# Altium PCB PCB.PcbDoc
Units mil, origin at the board's own origin, x right, y up, seen from the top; angles counter-clockwise.
Board outline 3930 x 3395 mil, 2 copper layers (Top Layer, Bottom Layer); 22 components, 59 nets, 336 pads, 114 vias.
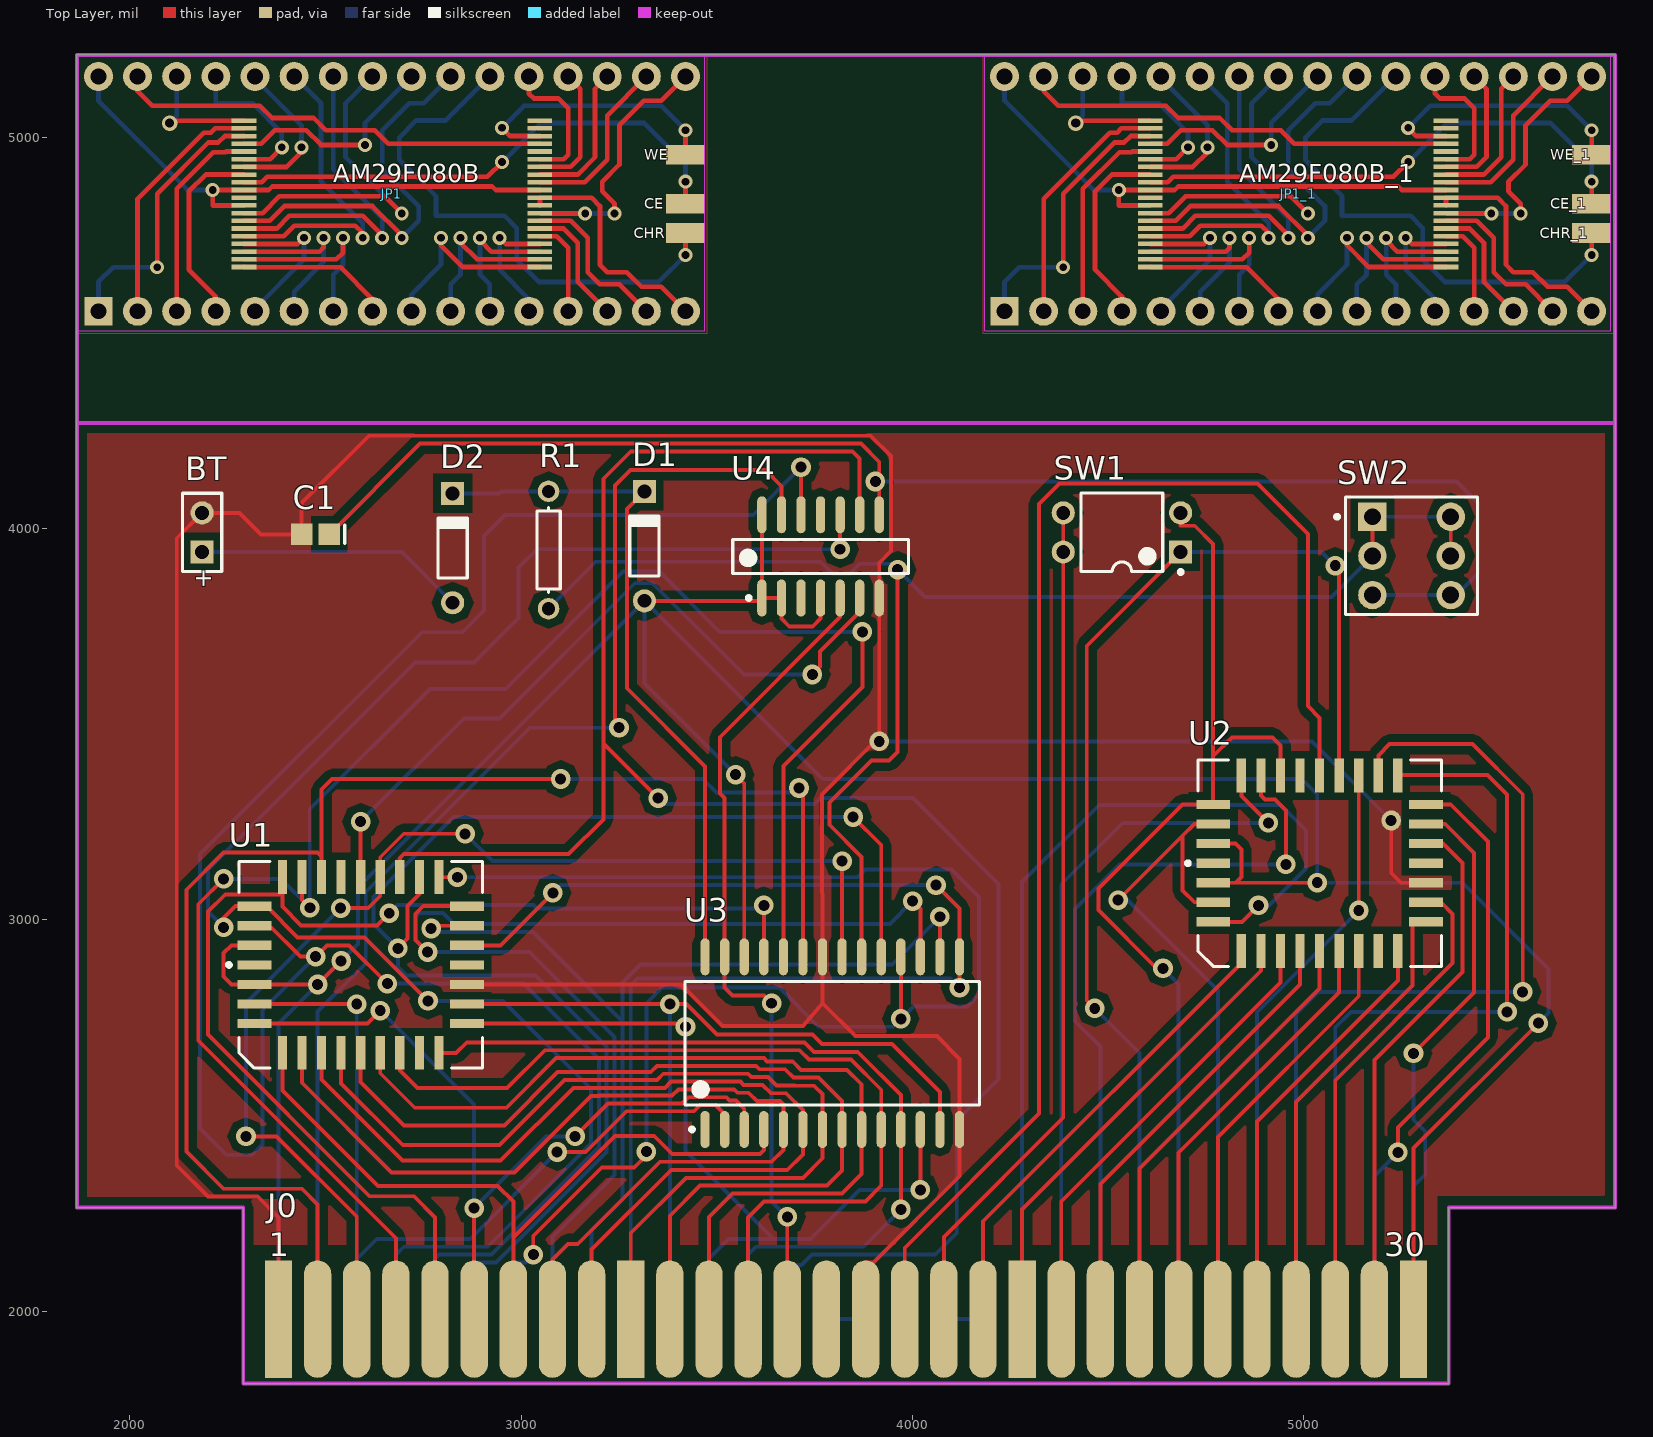
[diagram p0: Top Layer view]
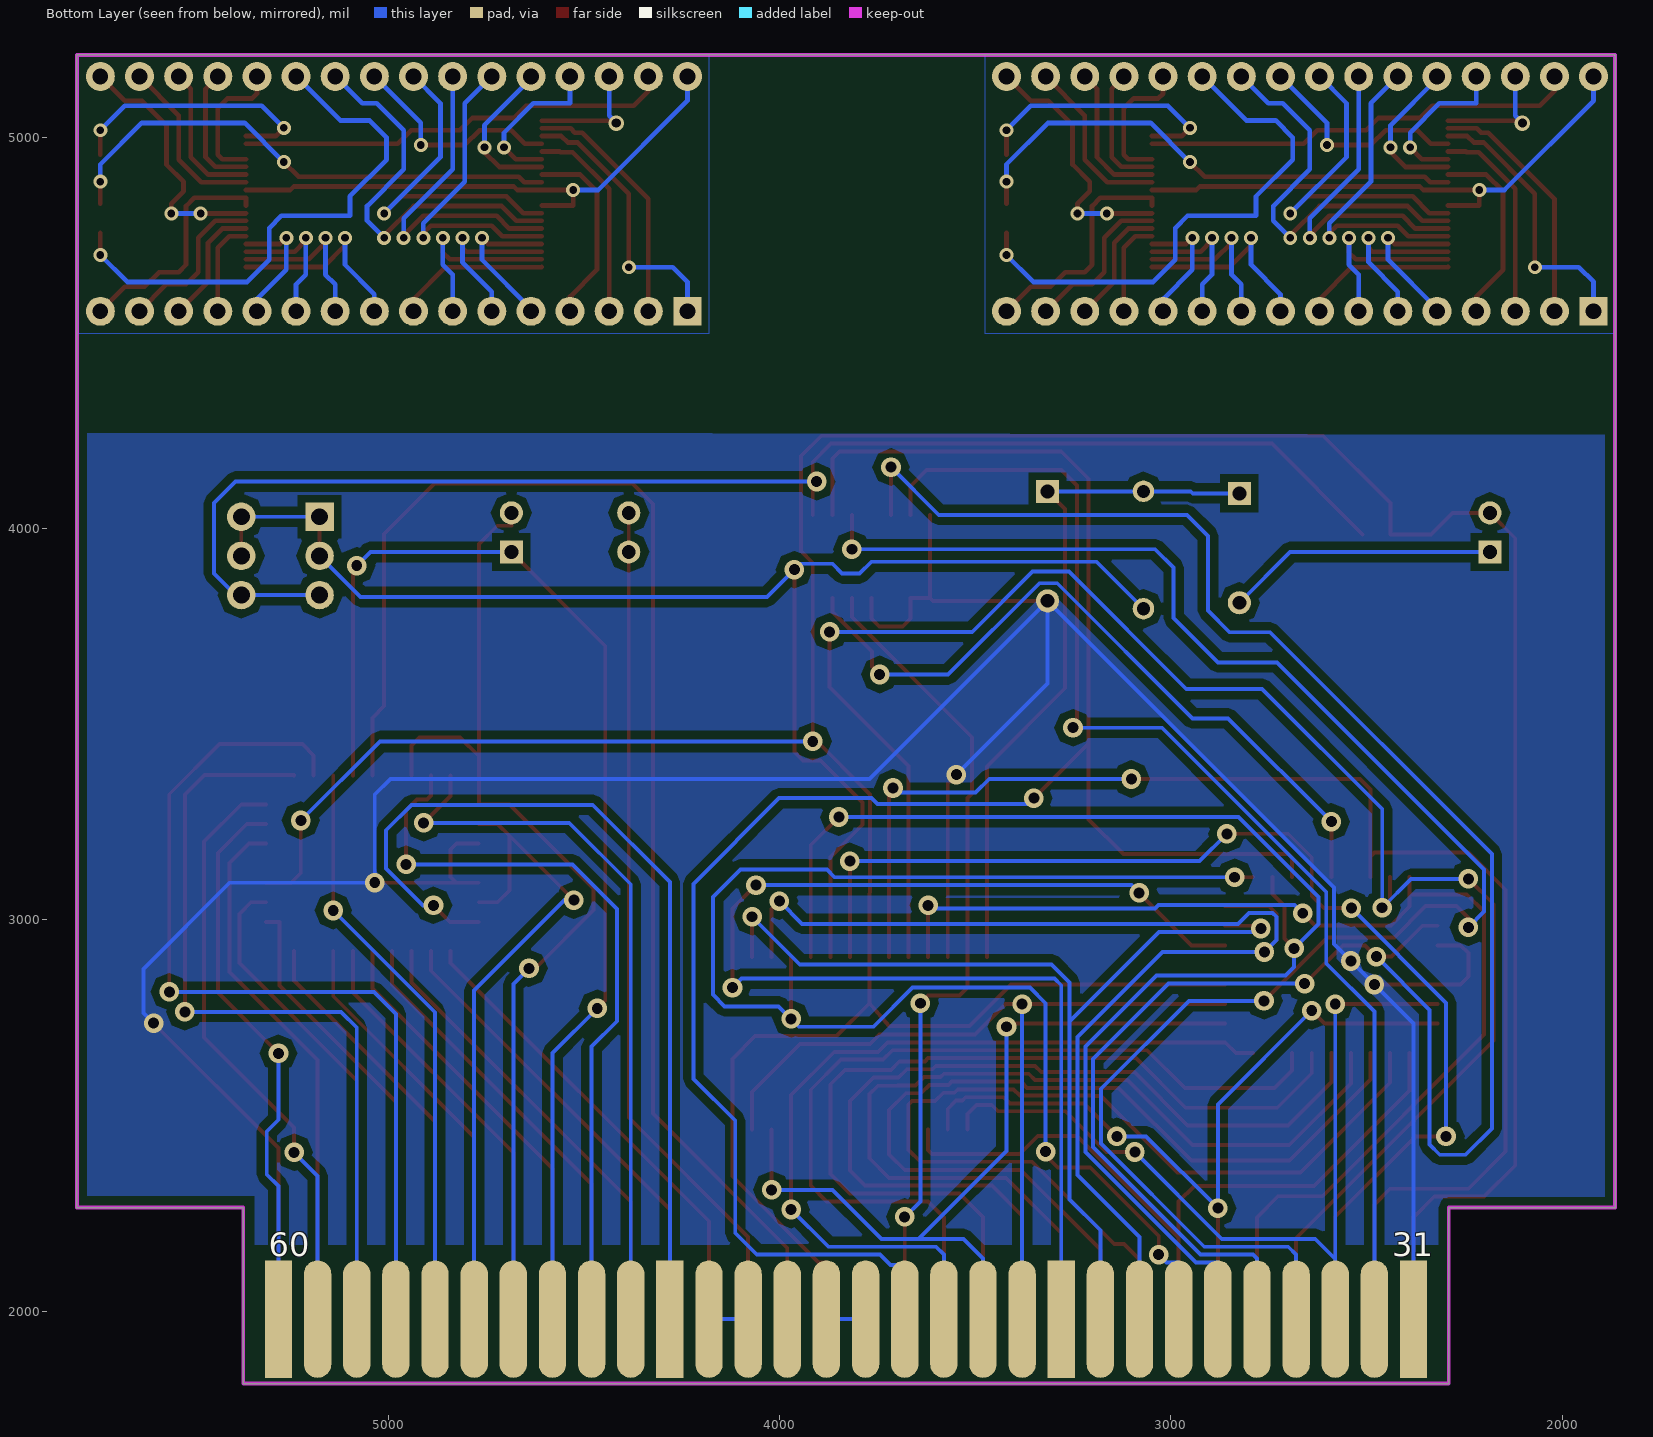
[diagram p1: Bottom Layer view, seen from below]

## Layer stack, top to bottom
Top Solder: solder mask 0.4, Solder Resist, Dk 3.5
Top Layer: signal copper 1.4
Dielectric 1: dielectric 12.6, FR-4, Dk 4.8
Bottom Layer: signal copper 1.4
Bottom Solder: solder mask 0.4, Solder Resist, Dk 3.5

## Board outline
2290,1815 2290,2265 1865,2265 1865,5210 5795,5210 5795,2265 5370,2265 5370,1815

## Design rules (kind name [scope] priority, off if disabled: settings)
Clearance Clearance_5 [InNamedPolygon('GND_L01_P000')] p1: gap=20 ignorepadtopadclearanceinfootprint=FALSE
Clearance Clearance_4 [InNamedPolygon('+5_L02_P002')] p2: gap=20 ignorepadtopadclearanceinfootprint=FALSE
Clearance Clearance_3 [InNamedPolygon('GND_L01_P000')] p3: gap=10 ignorepadtopadclearanceinfootprint=FALSE
Clearance Clearance_2 [InNamedPolygon('+5_L02_P002')] p4: gap=10 ignorepadtopadclearanceinfootprint=FALSE
Clearance Clearance_1 [InNamedPolygon('+5_L02_P002')] p5: gap=10 ignorepadtopadclearanceinfootprint=FALSE except(0: Arc-Hole Track-Hole SMDPad-Hole THPad-Hole Via-Hole Fill-Hole Poly-Hole Region-Hole Text-Hole)
Clearance [All] p6: gap=10 ignorepadtopadclearanceinfootprint=FALSE
PolygonConnect PolygonConnect_3 [All vs IsNamedPolygon('+5_L02_P002')] p1: connectstyle=Direct reliefconductorwidth=10 reliefentries=4 polygonreliefangle="90 Angle" airgapwidth=10
PolygonConnect PolygonConnect_2 [All vs IsNamedPolygon('GND_L01_P000')] p2: connectstyle=Direct reliefconductorwidth=10 reliefentries=4 polygonreliefangle="90 Angle" airgapwidth=10
PolygonConnect PolygonConnect_1 [All vs IsNamedPolygon('+5_L02_P002')] p3: connectstyle=Relief reliefconductorwidth=10 reliefentries=4 polygonreliefangle="90 Angle" airgapwidth=10
PolygonConnect [All] p4: connectstyle=Relief reliefconductorwidth=10 reliefentries=4 polygonreliefangle="90 Angle" airgapwidth=10
RoutingVias [All] p1: holewidth=28 width=50 viastyle="Through Hole" minholewidth=28 minwidth=50 maxholewidth=28 maxwidth=50
SolderMaskExpansion [All] p1: expansion=4
UnRoutedNet [All] p1: checkbadconnections=TRUE
Width [All] p1: maxlimit=10 minlimit=10 preferedwidth=10
29 further rules are at their usual default settings.

## Classes and differential pairs
component class Schematics: BT C1 D1 D2 J0 R1 SW1 SW2 U1 U2 U3 U4

## Components (designator, comment, footprint, x,y, rotation, side; value= is the part's Value field where it differs from the comment)
AM29F080B "TSOP40" TSOP40 2670,4855 r270 top
AM29F080B_1 "TSOP40" TSOP40 4985,4855 r270 top (schematic designator AM29F080B)
BT "3V Battery" BAT-2 2185,3990 r90 top
C1 "Cap Semi" C2512 2474.57,3985 r180 top value=68pF
CE "" SMD1,27-2,54 3420,4830 r90 top
CE_1 "" SMD1,27-2,54 5735,4830 r90 top (schematic designator CE)
CHR "" SMD1,27-2,54 3420,4755 r90 top
CHR_1 "" SMD1,27-2,54 5735,4755 r90 top (schematic designator CHR)
D1 "1n4148" DO-35 3315,3955 r90 top
D2 "1n4148" DO-35 2825,3950 r90 top
J0 "Famicom Edge Connector" CartridgeBondingFinger 2380,1980 r0 top
JP1 "MMC5" DIP32 1920,4555 r0 top
JP1_1 "MMC5" DIP32 4235,4555 r0 top (schematic designator JP1)
R1 "Res1" AXIAL-0.3 3070,3945 r270 top value=10K
SW1 "Mirroring Control" DIP-4 4535,3990 r180 top
SW2 "Switch" DPDT-6 5275,3930 r0 top
U1 "PRG ROM" PLCC32 2590,2885 r90 top
U2 "CHR ROM" PLCC32 5040,3145 r90 top
U3 "PRG RAM" SOP127P1207-28N 3795,2685 r90 top
U4 "PRG RAM /CS & PRG ROM /OE Generator" SOP127P636-14N 3765,3928.7 r90 top
WE "" SMD1,27-2,54 3420,4955 r90 top
WE_1 "" SMD1,27-2,54 5735,4955 r90 top (schematic designator WE)

## Footprints (in the part's own frame and the unit in brackets; to place one, negate y for a bottom-side part, rotate by r counter-clockwise, add the part's x,y. Pads: shape width x height; smd on the part's side, far side on the other; paste and mask are expansions set on the pad)
AXIAL-0.3 [mm] "Axial Device, Thru-Hole; 2 Leads; 0.3 in Pin Spacing"
  round 1.4 hole 0.85: 1(-3.81,0) 2(3.81,0)
  silkscreen extent -2.77,-0.76 2.77,0.76
BAT-2 [mm] "Battery; 2 Leads"
  rect 1.5x1.5 hole 0.9: 1(-1.27,0)
  round 1.5 hole 0.9: 2(1.27,0)
  silkscreen extent -2.54,-1.27 2.54,1.27
C2512 [mm] "Chip Capacitor, Body 2.54x1.27mm, IPC High Density"
  rect 1.4x1.4 smd: 1(-0.9,0) 2(0.9,0)
  silkscreen extent -1.9,-0.6 -1.9,0.6, body extent -1.45,-0.82 1.45,0.82, height 1.3
CartridgeBondingFinger [mil]
  rect 70x300 smd: 1(0,0) 10(900,0) 20(1900,0) 30(2900,0)
  oval 70x300 smd: 2(100,0) 3(200,0) 4(300,0) 5(400,0) 6(500,0) 7(600,0) 8(700,0) 9(800,0) 11(1000,0) 12(1100,0) 13(1200,0) 14(1300,0) 15(1400,0) 16(1500,0) 17(1600,0) 18(1700,0) 19(1800,0) 21(2000,0) 22(2100,0) 23(2200,0) 24(2300,0) 25(2400,0) 26(2500,0) 27(2600,0) 28(2700,0) 29(2800,0)
  rect 70x300 smd far side: 31(0,0) 40(900,0) 50(1900,0) 60(2900,0)
  oval 70x300 smd far side: 32(100,0) 33(200,0) 34(300,0) 35(400,0) 36(500,0) 37(600,0) 38(700,0) 39(800,0) 41(1000,0) 42(1100,0) 43(1200,0) 44(1300,0) 45(1400,0) 46(1500,0) 47(1600,0) 48(1700,0) 49(1800,0) 51(2000,0) 52(2100,0) 53(2200,0) 54(2300,0) 55(2400,0) 56(2500,0) 57(2600,0) 58(2700,0) 59(2800,0)
DIP32 [mil] "DIP32"
  rect 71.65x71.65 / inner rect 60x60 / far side rect 71.65x71.65 hole 40: 1(0,0)
  round 74 / inner round 60 / far side round 74 hole 40: 2(100,0) 3(200,0) 4(300,0) 5(400,0) 6(500,0) 7(600,0) 8(700,0) 9(800,0) 10(900,0) 11(1000,0) 12(1100,0) 13(1200,0) 14(1300,0) 15(1400,0) 16(1500,0) 17(1500,600) 18(1400,600) 19(1300,600) 20(1200,600) 21(1100,600) 22(1000,600) 23(900,600) 24(800,600) 25(700,600) 26(600,600) 27(500,600) 28(400,600) 29(300,600) 30(200,600) 31(100,600) 32(0,600)
DIP-4 [mm] "DIP; 4 Leads; Row Spacing 7.62 mm; Pitch 2.54 mm"
  rect 1.5x1.5 hole 0.9: 1(-3.81,1.27)
  round 1.5 hole 0.9: 2(-3.81,-1.27) 3(3.81,-1.27) 4(3.81,1.27)
  silkscreen extent -3.94,-2.55 2.65,2.69, body extent -3.15,-2.5 3.15,2.5, height 5.6
DO-35 [mm] "Diode, Axial; Body 3.8 x 1.9 mm (LxDia. max), Lead Dia. 0.53 mm (max)"
  round 1.5 hole 0.9: 1(-3.55,0)
  rect 1.5x1.5 hole 0.9: 2(3.55,0)
  silkscreen extent -1.95,-0.95 2.05,0.95
DPDT-6 [mm]
  rect 1.85x1.85 hole 1.1: 1(-2.54,2.54)
  round 1.85 hole 1.1: 2(-2.54,0) 3(-2.54,-2.54) 4(2.54,-2.54) 5(2.54,0) 6(2.54,2.54)
  silkscreen extent -4.96,-3.81 4.28,3.81
PLCC32 [mm] "Leaded Chip Carrier; 32 Leads; Body 11.5 x 14 mm"
  rect 0.6x2.2 smd: 1(0,6.9) 2(-1.27,6.9) 3(-2.54,6.9) 4(-3.81,6.9) 14(-3.81,-6.9) 15(-2.54,-6.9) 16(-1.27,-6.9) 17(0,-6.9) 18(1.27,-6.9) 19(2.54,-6.9) 20(3.81,-6.9) 30(3.81,6.9) 31(2.54,6.9) 32(1.27,6.9)
  rect 2.2x0.6 smd: 5(-5.7,5.08) 6(-5.7,3.81) 7(-5.7,2.54) 8(-5.7,1.27) 9(-5.7,0) 10(-5.7,-1.27) 11(-5.7,-2.54) 12(-5.7,-3.81) 13(-5.7,-5.08) 21(5.7,-5.08) 22(5.7,-3.81) 23(5.7,-2.54) 24(5.7,-1.27) 25(5.7,0) 26(5.7,1.27) 27(5.7,2.54) 28(5.7,3.81) 29(5.7,5.08)
  silkscreen extent -6.7,-7.9 6.7,8.67
SMD1,27-2,54 [mil] "SMD1,27-2,54"
  rect 50x100 smd: 1(0,0)
SOP127P636-14N [mm] "SOP, 14-Leads, Body 11x4.7mm, Pitch 1.27mm, IPC Medium Density"
  oval 2.4x0.6 smd: 1(-2.7,3.81) 2(-2.7,2.54) 3(-2.7,1.27) 4(-2.7,0) 5(-2.7,-1.27) 6(-2.7,-2.54) 7(-2.7,-3.81) 8(2.7,-3.81) 9(2.7,-2.54) 10(2.7,-1.27) 11(2.7,0) 12(2.7,1.27) 13(2.7,2.54) 14(2.7,3.81)
  silkscreen extent -2.82,-5.7 1.1,5.7, body extent -2.36,-5.72 2.36,5.71, height 1.5
SOP127P1207-28N [mm] "SOP, 28-Leads, Body 18.1x8.6mm, Pitch 1.27mm, IPC Medium Density"
  oval 2.4x0.6 smd: 1(-5.6,8.255) 2(-5.6,6.985) 3(-5.6,5.715) 4(-5.6,4.445) 5(-5.6,3.175) 6(-5.6,1.905) 7(-5.6,0.635) 8(-5.6,-0.635) 9(-5.6,-1.905) 10(-5.6,-3.175) 11(-5.6,-4.445) 12(-5.6,-5.715) 13(-5.6,-6.985) 14(-5.6,-8.255) 15(5.6,-8.255) 16(5.6,-6.985) 17(5.6,-5.715) 18(5.6,-4.445) 19(5.6,-3.175) 20(5.6,-1.905) 21(5.6,-0.635) 22(5.6,0.635) 23(5.6,1.905) 24(5.6,3.175) 25(5.6,4.445) 26(5.6,5.715) 27(5.6,6.985) 28(5.6,8.255)
  silkscreen extent -5.72,-9.55 4,9.55, body extent -5.01,-9.52 5.01,9.53, height 3.05
TSOP40 [mil] "TSOP40"
  rect 11.81x62.99 smd: 1(-187.01,-377.95) 2(-167.32,-377.95) 3(-147.64,-377.95) 4(-127.95,-377.95) 5(-108.27,-377.95) 6(-88.58,-377.95) 7(-68.9,-377.95) 8(-49.21,-377.95) 9(-29.53,-377.95) 10(-9.84,-377.95) 11(9.84,-377.95) 12(29.53,-377.95) 13(49.21,-377.95) 14(68.9,-377.95) 15(88.58,-377.95) 16(108.27,-377.95) 17(127.95,-377.95) 18(147.64,-377.95) 19(167.32,-377.95) 20(187.01,-377.95) 21(187.01,377.95) 22(167.32,377.95) 23(147.64,377.95) 24(127.95,377.95) 25(108.27,377.95) 26(88.58,377.95) 27(68.9,377.95) 28(49.21,377.95) 29(29.53,377.95) 30(9.84,377.95) 31(-9.84,377.95) 32(-29.53,377.95) 33(-49.21,377.95) 34(-68.9,377.95) 35(-88.58,377.95) 36(-108.27,377.95) 37(-127.95,377.95) 38(-147.64,377.95) 39(-167.32,377.95) 40(-187.01,377.95)

## Part data
BT: library part Battery, "Multicell Battery", LatestRevisionDate=17-Jul-2002, LatestRevisionNote="Re-released for DXP Platform.", PackageDescription="Battery; 2 Leads", PackageReference=BAT-2, Published=24-Mar-1999, Publisher="Altium Limited"
C1: "Capacitor (Semiconductor SIM Model)", LatestRevisionDate=29-May-2009, LatestRevisionNote="IPC-7351 Footprint Added.", PackageDescription="Chip Capacitor", PackageReference=C1206, Published=8-Jun-2000, Publisher="Altium Limited"
CE CE_1 CHR CHR_1 WE WE_1: library part SMD1,27-2,54, PackageName=SMD1,27-2,54
D1 D2: library part "Diode 1N4148", "High Conductance Fast Diode", Code_JEDEC=DO-204-AH, ComponentLink1Description="Manufacturer Link", ComponentLink1URL=http://www.fairchildsemi.com/, ComponentLink2Description=Datasheet, ComponentLink2URL=http://www.fairchildsemi.com/ds/1N%2F1N4148.pdf, DatasheetVersion=1997, LatestRevisionDate=17-Jul-2002, LatestRevisionNote="Re-released for DXP Platform.", PackageDescription="Diode, Axial; Body 3.8 x 1.9 mm (LxDia. max), Lead Dia. 0.53 mm (max)", PackageReference=DO-35, Published=8-Jun-2000, Publisher="Altium Limited"
J0: library part CartridgeBondingFinger
JP1 JP1_1: library part DIP32, PackageName=DIP32
R1: "Resistor", LatestRevisionDate=17-Jul-2002, LatestRevisionNote="Re-released for DXP Platform.", PackageDescription="Axial Device, Thru-Hole; 2 Leads; 0.3 in Pin Spacing", PackageReference=AXIAL-0.3, Published=8-Jun-2000, Publisher="Altium Limited"
SW1: library part "SW DIP-2", "DIP Switch, 2 Position, SPST", LatestRevisionDate=17-Jul-2002, LatestRevisionNote="Re-released for DXP Platform.", PackageReference=DIP-4, Published=24-Mar-1999, Publisher="Altium Limited"
U1 U2: library part AT29C256
U3: library part UT6264
U4: library part 74HC20
AM29F080B AM29F080B_1: PackageName=TSOP40

## Via types
v1: diameter 50, hole 28, Top Layer to Bottom Layer, 66 vias
v2: diameter 35.69/35.69 (per signal layer), hole 19.69, Top Layer to Bottom Layer, tented both sides, 46 vias
v3: diameter 39.62/39.62 (per signal layer), hole 23.62, Top Layer to Bottom Layer, tented both sides, 2 vias

## Nets (pads, with @x,y where several pads share a name; then routed paths per layer and width w, separated by ;. In a path a pad name is that pad's centre, name@x,y a point inside that pad or via, vN(x,y) a via of type N, cw(c..) or ccw(c..) an arc to the next point about the centre after c; other vN are vias at no path point)
+5: D1.1 J0.30 J0.31 U1.2 U1.32 U2.2 U2.32 U3.26 U4.1 U4.2 U4.4 U4.14 | length 8808.5
  Top Layer w10: U1.32 2260,2935 2240,2915 2240,2855 2260,2835 U1.2 v1(2480,2835) v1(2540,2895) ; D1.1 3607.84,3815.24 U4.1 ; v1(3548,3371) 3570,3349 U3.26 ; U4.14 U4.1 ; U4.4 3765,3770 3745,3750 3685,3750 3665,3770 U4.2 U4.1 ; U2.2 4825,3095 ; U2.32 4825,3195 4840,3180 4840,3110 4825,3095 ; v1(5034,3095) 4825,3095 ; J0.30 5280,2417 v1(5599,2736)
  Bottom Layer w10: J0.31 2380,2735 v1(2480,2835) v1(2540,2895) 2583,2938 2583,3083.24 D1.1 ; v1(3548,3371) 3315,3604 D1.1 ; v1(5599,2736) 5625,2762 5625,2875 5405,3095 v1(5034,3095) 5034,3320 4994,3360 3770.24,3360 D1.1
"CPU A0": J0.13 U1.11 U3.10 | length 2254.8
  Top Layer w10: U1.11 2690,2615 2735,2570 2963.66,2570 3060.66,2667 3711.36,2667 3735.43,2642.93 3843.07,2642.93 3920,2566 U3.10 3920,2321 3880,2281 3621,2281 3580,2240 J0.13
"CPU A1": J0.12 U1.10 U3.9 | length 2324.8
  Top Layer w10: U1.10 2640,2608.26 2728.26,2520 2962.29,2520 3089.29,2647 3620,2647 3628.54,2638.46 3693.97,2638.46 3715.43,2617 3833,2617 3870,2580 U3.9 3870,2351 3820,2301 3540,2301 3480,2241 J0.12
"CPU A2": J0.11 U1.9 U3.8 | length 2379.8
  Top Layer w10: U1.9 2590,2586.07 2701.07,2475 2957.29,2475 3093.29,2611 3331.18,2611 3347.18,2627 3600,2627 3608.54,2618.46 3673.97,2618.46 3695.43,2597 3760,2597 3820,2537 U3.8 3820,2360 3781,2321 3457,2321 3380,2244 J0.11
"CPU A3": J0.10 U1.8 U3.7 | length 2423.4
  Top Layer w10: U1.8 2540,2582.47 2697.47,2425 2945,2425 3111,2591 3347.18,2591 3363.18,2607 3580,2607 3588.54,2598.46 3630.54,2598.46 3652,2577 3698.26,2577 3699.01,2576.25 3748.75,2576.25 3770,2555 U3.7 3770,2391 3720,2341 3421,2341 3280,2200 J0.10
"CPU A4": J0.9 U1.7 U3.6 | length 2429.5
  Top Layer w10: U1.7 2490,2592 2697,2385 2947.79,2385 3133.79,2571 3367.18,2571 3383.18,2587 3560,2587 3568.54,2578.46 3617.13,2578.46 3638.59,2557 3677,2557 3720,2514 U3.6 3720,2401 3680,2361 3383.62,2361 3180,2157.38 J0.9
"CPU A5": J0.8 U1.6 U3.5 | length 2479.4
  Top Layer w10: U1.6 2440,2584 2669,2355 2983.32,2355 3178.82,2550.5 3200.16,2550.5 3200.66,2551 3385.92,2551 3401.92,2567 3544.18,2567 3552.72,2558.46 3580.66,2558.46 3602.13,2537 3661,2537 3670,2528 U3.5 3670,2412 3640,2382 3354.62,2382 3144.62,2172 3120,2172 3080,2132 J0.8
"CPU A6": J0.7 U1.5 U3.4 | length 1927.6
  Top Layer w10: U1.5 2390,2563.92 2633.92,2320 2940,2320 2980,2280 2980,2188.12 ; J0.7 2980,2188.12 ; U3.4 3620,2412 3610,2402 3386.12,2402 3340.12,2448 3239.88,2448 2980,2188.12
"CPU A7": J0.6 U1.4 U3.3 | length 2094.9
  Top Layer w10: U1.4 2607,2735 v1(2640,2768) ; J0.6 v1(2880,2263.54) ; v1(3138,2447) 3222,2531 3411.41,2531 3427.18,2546.77 3524.41,2546.77 3532.72,2538.46 3548.54,2538.46 3570,2517 U3.3
  Bottom Layer w10: v1(2640,2768) 2880,2528 v1(2880,2263.54) 3063.46,2447 v1(3138,2447)
"CPU A8": J0.5 U1.29 U3.25 | length 3041.2
  Top Layer w10: U1.29 2390,3065 ; v1(2663,3017) 2632,2986 2438,2986 2390,3034 2390,3065 ; J0.5 2780,2240 2726,2294 2612.73,2294 2200,2706.73 2200,3021 2244,3065 2390,3065 ; U3.25 v1(3620,3037)
  Bottom Layer w10: v1(2663,3017) 2684,3038 3032,3038 3041,3029 3612,3029 v1(3620,3037)
"CPU A9": J0.4 U1.28 U3.24 | length 4591.9
  Top Layer w10: v1(2240,3105) 2175,3040 2175,2691.51 2680,2186.51 J0.4 ; U1.28 2440,3051 v1(2460,3031) ; U3.24 3670,3393.03 3872,3595.03 v1(3872,3736)
  Bottom Layer w10: v1(2240,3105) 2386,3105 v1(2460,3031) 2460,3283 2767,3590 2960.71,3590 3260.71,3890 3353.45,3890 3507.45,3736 v1(3872,3736)
"CPU A10": J0.3 U1.24 U3.21 | length 3004.4
  Top Layer w10: v1(2297,2447) 2374.67,2447 2580,2241.67 J0.3 ; v1(2539,3030) 2609.34,3030 2640,3060.66 U1.24 2640,3160 2700,3220 v1(2857,3220) ; U3.21 v1(3820,3150)
  Bottom Layer w10: v1(2297,2447) 2297,2788 v1(2539,3030) ; v1(2857,3220) 2927,3150 v1(3820,3150)
"CPU A11": J0.2 U1.27 U3.23 | length 3651.3
  Top Layer w10: J0.2 2480,2273 2440,2313 2240,2313 2145,2408 2145,3077 2240,3172 2480,3172 2490,3162 ; U1.27 2490,3162 ; v1(3101,3360) 2517,3360 2490,3333 2490,3162 ; v1(3710,3337) 3720,3327 U3.23
  Bottom Layer w10: v1(3101,3360) 3464,3360 3499,3325 3698,3325 v1(3710,3337)
"CPU A12": J0.33 U1.3 U3.2 | length 2218
  Top Layer w10: U1.3 v1(2580,2785) ; v1(3092,2407) 3165,2407 3269,2511 3441.92,2511 3457.69,2526.77 3496.81,2526.77 3520,2503.59 U3.2
  Bottom Layer w10: J0.33 2580,2134 ; v1(2580,2785) 2580,2134 ; v1(3092,2407) 2870,2185 2631,2185 2580,2134
"CPU A13": J0.34 U1.30 U4.10 | length 4370.9
  Top Layer w10: v1(2240,2981) 2240,3005 2270,3035 U1.30 2349,3035 2429,2955 2600,2955 v1(2762,2793) ; v1(3815,3947) U4.10
  Bottom Layer w10: v1(2240,2981) 2200,3021 2200,3129 2729,3658 2880,3658 2993,3771 2993,3900 3040,3947 v1(3815,3947) ; J0.34 2680,2145 2700,2165 2914.78,2165 3178.5,2428.72 3178.5,2568.5 2954,2793 v1(2762,2793)
"CPU A14": J0.35 U1.31 U4.12 | length 5575.3
  Top Layer w10: U1.31 2357,2985 2436,2906 v1(2475,2906) 2504,2935 2560,2935 v1(2658,2837) ; U4.12 v1(3715,4157)
  Bottom Layer w10: v1(2475,2906) 2339,2770 2339,2426 2313,2400 2247,2400 2180,2467 2180,3168 2747,3735 2850,3735 2905,3790 2905,3981 2959,4035 3593,4035 v1(3715,4157) ; v1(2658,2837) 3006.52,2837 3198.5,2645.02 3198.5,2419.5 2924,2145 2790,2145 2780,2135 J0.35
"CPU D0": J0.43 U1.13 U3.11 | length 2142.9
  Top Layer w10: U1.13 2790,2660 2834,2660 2861,2687 3723.93,2687 3748,2662.93 3860.07,2662.93 3970,2553 U3.11 v1(3970,2260)
  Bottom Layer w10: J0.43 3580,2145 3600,2165 3875,2165 v1(3970,2260)
"CPU D1": J0.42 U1.14 U3.12 | length 2118.9
  Top Layer w10: U1.14 3412,2735 v1(3420,2727) ; v1(4020,2310) U3.12
  Bottom Layer w10: v1(3420,2727) 3420,2410 3645,2185 ; J0.42 3480,2135 3530,2185 3645,2185 ; v1(4020,2310) 3864,2310 3739,2185 3645,2185
"CPU D2": J0.41 U1.15 U3.13 | length 2202
  Top Layer w10: U1.15 v1(3380,2785) 3422,2785 3500,2707 3744.14,2707 3768.22,2682.93 3947.07,2682.93 4070,2560 U3.13
  Bottom Layer w10: J0.41 v1(3380,2785)
"CPU D3": J0.40 U1.18 U3.15 | length 3258.6
  Top Layer w10: U1.18 2947,2935 v1(3081,3069) ; v1(4060,3089) 4120,3029 U3.15 v1(4120,2827)
  Bottom Layer w10: v1(3081,3069) 3101,3089 v1(4060,3089) ; J0.40 3280,2833 3297,2850 4097,2850 v1(4120,2827)
"CPU D4": J0.39 U1.19 U3.16 | length 2557.4
  Top Layer w10: v1(2770,2978) 2777,2985 U1.19 ; U3.16 v1(4070,3008)
  Bottom Layer w10: v1(2770,2978) 2779,2969 3030.36,2969 3258.5,2740.86 ; J0.39 3180,2207 3258.5,2285.5 3258.5,2740.86 ; v1(4070,3008) 3948.15,2886.15 3304.65,2886.15 3258.5,2840 3258.5,2740.86
"CPU D5": J0.38 U1.20 U3.17 | length 3166.9
  Top Layer w10: v1(2761,2918) 2730,2949 2730,3015 2750,3035 U1.20 ; v1(4000,3048) 4020,3028 U3.17
  Bottom Layer w10: J0.38 3080,2190 3238.5,2348.5 3238.5,2700.47 3020.97,2918 v1(2761,2918) 2730,2949 2730,3008 2740,3018 2800,3018 2828,2990 3942,2990 v1(4000,3048)
"CPU D6": J0.37 U1.21 U3.18 | length 3782.7
  Top Layer w10: U1.21 2790,3109 v1(2837,3109) ; v1(3031,2145) 3031,2192 3206,2367 3289,2367 3320,2398 v1(3320,2408) ; v1(3970,2747) U3.18
  Bottom Layer w10: v1(2837,3109) 3859,3109 3879,3129 4100,3129 4170,3059 4170,2809 4140,2779 4002,2779 v1(3970,2747) 3950,2727 3760,2727 3660,2827 3360,2827 3320,2787 v1(3320,2408) ; J0.37 2980,2125 3011,2125 v1(3031,2145)
"CPU D7": J0.36 U1.22 U3.19 | length 3593.5
  Top Layer w10: v1(2685,2927) 2710,2952 2710,3036 2740,3066 U1.22 ; v1(3848.19,3262.81) 3920,3191 U3.19
  Bottom Layer w10: J0.36 2880,2125 2936,2125 3218.5,2407.5 3218.5,2676 3036.5,2858 2707,2858 2685,2880 v1(2685,2927) 2623,2989 2623,3058.81 2827,3262.81 v1(3848.19,3262.81)
GND: BT.2 C1.2 J0.1 J0.16 U1.16 U2.16 U3.14 U3.22 U4.7 | length 9495.2
  Top Layer w10: J0.1 2380,2240 2327,2293 2200,2293 2120,2373 2120,3975 BT.2 2280,4040 2335,3985 C1.2 2439.13,4065.13 2611,4237 3893,4237 3945,4185 3945,3942 3915,3912 U4.7 v1@3915,3466.81 ; U1.16 3408,2835 3514,2729 3720,2729 3770,2787.07 ; J0.16 3880,2125 3900,2125 4120,2345 U3.14 4120,2645 4062.07,2702.93 3854.14,2702.93 3770,2787.07 ; v1(3915,3456) v1@3915,3466.81 ; v1(5223,3254) 5223,3120 5248,3095 U2.16 ; 3770,2787.07 U3.22 3768.19,3231.81 3768.19,3320 v1@3915,3466.81
  Bottom Layer w10: v1(3915,3456) 5021,3456 v1(5223,3254)
NetBT_1: BT.1 D2.1 | length 693.8
  Bottom Layer w10: BT.1 2695.24,3940 D2.1
NetC1_1: C1.1 SW2.3 SW2.4 U4.8 | length 3705.3
  Top Layer w10: C1.1 2742,4217 3868,4217 3915,4170 v1@3915,4110 ; v1(3905,4120) v1@3915,4110 ; U4.8 v1@3915,4110
  Bottom Layer w10: v1(3905,4120) 5390,4120 5445,4065 5445,3885 5390,3830 SW2.4 SW2.3
NetD1_2: D1.2 D2.2 R1.1 U3.28 | length 1783
  Top Layer w10: D1.2 3270,4049.76 3270,3591.79 3470,3391.79 U3.28
  Bottom Layer w10: D2.2 2944,4089.76 2949.24,4095 R1.1 3192,4095 3192.24,4094.76 D1.2
NetJ0_14: J0.14 U3.27 U4.5 | length 2087.7
  Top Layer w10: v1(3640,2787) 3620,2807 3540,2807 3520,2827 U3.27 3520,3311 3508,3323 3508,3466.75 3815,3773.75 U4.5 ; J0.14 v1(3680,2241)
  Bottom Layer w10: v1(3640,2787) 3640,2281 v1(3680,2241)
NetJ0_17: J0.17 U2.25 | length 3616.1
  Top Layer w10: J0.17 3980,2162 4323,2505 4323,4063 4375,4115 4881,4115 5010,3986 5010,3546.06 5040,3516.06 U2.25
NetJ0_18: J0.18 SW1.3 SW1.4 | length 2186.3
  Top Layer w10: J0.18 4080,2190 4385,2495 SW1.4 SW1.3
NetJ0_32: J0.32 U4.13 | length 3117.3
  Top Layer w10: v1(3250,3491) 3240,3501 3240,4110 3279,4149 3624,4149 3665,4108 U4.13
  Bottom Layer w10: J0.32 2480,2766 2603,2889 2603,3071.13 3022.87,3491 v1(3250,3491)
NetJ0_44: J0.44 U1.23 U4.9 | length 5027
  Top Layer w10: U1.23 2690,3158 2700,3168 3121,3168 3210,3257 3210,3451 ; v1(3350,3311) 3210,3451 ; U4.9 3865,4179 3847,4197 3280,4197 3210,4127 3210,3451
  Bottom Layer w10: v1(3350,3311) 3364.47,3296.53 3750,3296.53 3764.47,3311 4001,3311 4220,3092 4220,2594 4113,2487 4113,2200 4058,2145 3743,2145 3716,2118 3680,2118 J0.44
NetJ0_45: J0.45 J0.46 | length 100
  Bottom Layer w10: J0.45 J0.46
NetJ0_48: J0.48 J0.49 | length 100
  Bottom Layer w10: J0.48 J0.49
NetJ0_56: J0.56 U2.23 | length 1497.1
  Top Layer w10: v1(5140,3024) U2.23
  Bottom Layer w10: J0.56 4880,2764 v1(5140,3024)
NetR1_2: R1.2 SW2.1 SW2.2 SW2.5 SW2.6 U3.20 | length 3786.6
  Top Layer w10: U3.20 3870,3161.19 3788.19,3243 3788.19,3300 3895.19,3407 3940,3407 3962,3429 v1(3962,3895) ; SW2.2 SW2.1 ; SW2.5 SW2.6
  Bottom Layer w10: R1.2 3190,3915 3765,3915 3795,3885 3840,3885 3865,3910 3962,3910 v1(3962,3895) 4032,3825 5070,3825 SW2.2 ; SW2.1 SW2.6
NetU1_25: U1.25 U4.6 | length 1889.9
  Top Layer w10: U1.25 v1(2590,3251) ; v1(3744,3627) 3764,3647 3764,3686 3865,3787 U4.6
  Bottom Layer w10: v1(2590,3251) 2854,3515 2945.24,3515 3290.24,3860 3336,3860 3569,3627 v1(3744,3627)
"PPU A0": J0.25 U2.11 | length 1089.7
  Top Layer w10: J0.25 4780,2445 5140,2805 U2.11
"PPU A1": J0.24 U2.10 | length 1110.4
  Top Layer w10: J0.24 4680,2405 5090,2815 U2.10
"PPU A2": J0.23 U2.9 | length 1131.1
  Top Layer w10: J0.23 4580,2365 5040,2825 U2.9
"PPU A3": J0.22 U2.8 | length 1151.8
  Top Layer w10: J0.22 4480,2325 4990,2835 U2.8
"PPU A4": J0.21 U2.7 | length 1172.5
  Top Layer w10: J0.21 4380,2280 4940,2840 U2.7
"PPU A5": J0.20 U2.6 | length 1193.3
  Top Layer w10: J0.20 4280,2260 4890,2870 U2.6
"PPU A6": J0.19 U2.5 | length 1214
  Top Layer w10: J0.19 4180,2230 4840,2890 U2.5
"PPU A7": J0.50 U2.4 | length 2341.5
  Top Layer w10: U2.4 4842,2995 v1(4884,3037)
  Bottom Layer w10: J0.50 4280,3097 4477,3294 4940,3294 5005,3229 5005,3131 4911,3037 v1(4884,3037)
"PPU A8": J0.51 U2.29 | length 1855
  Top Layer w10: U2.29 4840,3317 v1(4909,3248)
  Bottom Layer w10: J0.51 4380,3091 4537,3248 v1(4909,3248)
"PPU A9": J0.52 U2.28 | length 1930.3
  Top Layer w10: U2.28 4890,3318 4900,3308 4926,3308 4954,3280 v1(4954,3142)
  Bottom Layer w10: J0.52 4480,2676 4415,2741 4415,3028 4529,3142 v1(4954,3142)
"PPU A10": J0.53 SW1.1 U2.24 | length 3064.6
  Top Layer w10: v1(4465.5,2774) 4445,2794.5 4445,3700 SW1.1 ; v1(5080,3905) 5090,3895 U2.24
  Bottom Layer w10: v1(4465.5,2774) 4580,2659.5 J0.53 ; SW1.1 5045,3940 v1(5080,3905)
"PPU A11": J0.54 SW1.2 U2.27 U2.30 | length 2776.8
  Top Layer w10: v1(4640,2876) 4624,2876 4475,3025 4475,3080 4690,3295 U2.30@4768,3295 ; SW1.2 4685,4007 4721,4007 4768,3960 U2.30@4768,3295 ; U2.27 4940,3446 4920,3466 4816,3466 4768.35,3418.35 U2.30 U2.30@4768,3295
  Bottom Layer w10: v1(4640,2876) 4680,2836 J0.54
"PPU A12": J0.55 U2.3 U2.31 | length 1744.2
  Top Layer w10: v1(4525.5,3050.5) 4690,3215 ; U2.3 4720,3045 4690,3075 4690,3215 ; U2.31 4720,3245 4690,3215
  Bottom Layer w10: v1(4525.5,3050.5) 4549.5,3050.5 4780,2820 J0.55
"PPU D0": J0.26 U2.13 | length 1089.7
  Top Layer w10: J0.26 4880,2485 5240,2845 U2.13
"PPU D1": J0.27 U2.14 | length 1172.2
  Top Layer w10: J0.27 4980,2535 5277.81,2832.81 5277.81,2995 U2.14
"PPU D2": J0.28 U2.15 | length 1240
  Top Layer w10: J0.28 5080,2590 5380,2890 5380,3014.96 5349.96,3045 U2.15
"PPU D3": J0.29 U2.18 | length 1372.2
  Top Layer w10: J0.29 5180,2642 5405,2867 5405,3144.96 5354.96,3195 U2.18
"PPU D4": J0.60 U2.19 | length 1434.1
  Top Layer w10: v1(5280,2659.18) 5435,2814.18 5435,3171 5361,3245 U2.19
  Bottom Layer w10: J0.60 5280,2320 5310,2350 5310,2459.39 5280,2489.39 v1(5280,2659.18)
"PPU D5": J0.59 U2.20 | length 1537.8
  Top Layer w10: v1(5240,2406) 5240,2470 5470,2700 5470,3200 5375,3295 U2.20
  Bottom Layer w10: J0.59 5180,2346 v1(5240,2406)
"PPU D6": J0.58 U2.21 | length 2055.9
  Top Layer w10: U2.21 5240,3370 5469,3370 5519,3320 v1(5519,2765)
  Bottom Layer w10: J0.58 5080,2725 5120,2765 v1(5519,2765)
"PPU D7": J0.57 U2.22 | length 2371.8
  Top Layer w10: U2.22 5190,3420 5219,3449 5431,3449 5559,3321 v1(5559,2816)
  Bottom Layer w10: J0.57 4980,2760 5036,2816 v1(5559,2816)
pads on no net: AM29F080B.1 AM29F080B.2 AM29F080B.3 AM29F080B.4 AM29F080B.5 AM29F080B.6 AM29F080B.7 AM29F080B.8 AM29F080B.9 AM29F080B.10 AM29F080B.11 AM29F080B.12 AM29F080B.13 AM29F080B.14 AM29F080B.15 AM29F080B.16 AM29F080B.17 AM29F080B.18 AM29F080B.19 AM29F080B.20 AM29F080B.21 AM29F080B.22 AM29F080B.23 AM29F080B.24 AM29F080B.25 AM29F080B.26 AM29F080B.27 AM29F080B.28 AM29F080B.29 AM29F080B.30 AM29F080B.31 AM29F080B.32 AM29F080B.33 AM29F080B.34 AM29F080B.35 AM29F080B.36 AM29F080B.37 AM29F080B.38 AM29F080B.39 AM29F080B.40 AM29F080B_1.1 AM29F080B_1.2 AM29F080B_1.3 AM29F080B_1.4 AM29F080B_1.5 AM29F080B_1.6 AM29F080B_1.7 AM29F080B_1.8 AM29F080B_1.9 AM29F080B_1.10 AM29F080B_1.11 AM29F080B_1.12 AM29F080B_1.13 AM29F080B_1.14 AM29F080B_1.15 AM29F080B_1.16 AM29F080B_1.17 AM29F080B_1.18 AM29F080B_1.19 AM29F080B_1.20 AM29F080B_1.21 AM29F080B_1.22 AM29F080B_1.23 AM29F080B_1.24 AM29F080B_1.25 AM29F080B_1.26 AM29F080B_1.27 AM29F080B_1.28 AM29F080B_1.29 AM29F080B_1.30 AM29F080B_1.31 AM29F080B_1.32 AM29F080B_1.33 AM29F080B_1.34 AM29F080B_1.35 AM29F080B_1.36 AM29F080B_1.37 AM29F080B_1.38 AM29F080B_1.39 AM29F080B_1.40 CE.1 CE_1.1 CHR.1 CHR_1.1 J0.15 J0.47 JP1.1 JP1.2 JP1.3 JP1.4 JP1.5 JP1.6 JP1.7 JP1.8 JP1.9 JP1.10 JP1.11 JP1.12 JP1.13 JP1.14 JP1.15 JP1.16 JP1.17 JP1.18 JP1.19 JP1.20 JP1.21 JP1.22 JP1.23 JP1.24 JP1.25 JP1.26 JP1.27 JP1.28 JP1.29 JP1.30 JP1.31 JP1.32 JP1_1.1 JP1_1.2 JP1_1.3 JP1_1.4 JP1_1.5 JP1_1.6 JP1_1.7 JP1_1.8 JP1_1.9 JP1_1.10 JP1_1.11 JP1_1.12 JP1_1.13 JP1_1.14 JP1_1.15 JP1_1.16 JP1_1.17 JP1_1.18 JP1_1.19 JP1_1.20 JP1_1.21 JP1_1.22 JP1_1.23 JP1_1.24 JP1_1.25 JP1_1.26 JP1_1.27 JP1_1.28 JP1_1.29 JP1_1.30 JP1_1.31 JP1_1.32 U1.1 U1.12 U1.17 U1.26 U2.1 U2.12 U2.17 U2.26 U3.1 U4.3 U4.11 WE.1 WE_1.1
copper on no net: | length 41430.1
  Top Layer w12: 2020,4555 2020,4842.5 2188.75,5011.25 2207.5,5011.25 2218.57,5022.32 2292.05,5022.32 ; 2020,5155 2020,5117.5 2057.5,5080 2332.5,5080 2363.75,5048.75 2470,5048.75 2501.25,5017.5 2626.25,5017.5 2660.8,4982.95 3047.95,4982.95 ; v2(2070,4667.5) 2070,4855 2201.25,4986.25 2226.25,4986.25 2242.64,5002.64 2292.05,5002.64 ; v3@2101.25,5035.76 v3(2101.74,5035.76) 2107.99,5042.01 2292.05,5042.01 ; 2120,4555 2120,4867.5 2213.75,4961.25 2245,4961.25 2247.02,4963.27 2292.05,4963.27 ; 2220,4555 2220,4592.5 2151.25,4661.25 2151.25,4861.25 2194.21,4904.21 2292.05,4904.21 ; 2292.05,4667.99 2361.29,4667.5 2538.75,4667.5 2620,4586.25 2620,4555 ; 2292.05,4687.68 2527.68,4687.68 2545,4705 v2(2545,4742.5) ; 2292.05,4707.36 2484.86,4707.36 2495,4717.5 v2(2495,4742.5) ; 2292.05,4727.05 2429.55,4727.05 v2(2445,4742.5) ; 2292.05,4746.73 2392.98,4746.73 2420,4773.75 2576.25,4773.75 2595,4755 v2(2595,4742.5) ; 2292.05,4766.42 2375.17,4766.42 2407.5,4798.75 2595,4798.75 2645,4748.75 v2(2645,4742.5) ; 2292.05,4786.1 2357.35,4786.1 2395,4823.75 2620,4823.75 2695,4748.75 v2(2695,4742.5) ; 2292.05,4805.79 2339.54,4805.79 2382.5,4848.75 2651.25,4848.75 v2(2695,4805) ; 2292.05,4825.47 2212.03,4825.47 v2(2212.03,4864.84) 2292.05,4864.84 2354.84,4864.84 2363.75,4873.75 2926.25,4873.75 2935.16,4864.84 3047.95,4864.84 ; 2292.05,4884.53 2337.03,4884.53 2351.25,4898.75 2913.75,4898.75 v2(2951.25,4936.25) ; 2292.05,4923.9 2292.19,4923.75 2401.25,4923.75 2438.75,4961.25 v2(2438.75,4973.75) ; 2292.05,4943.58 2358.58,4943.58 v2(2388.75,4973.75) ; 2292.05,4982.95 2335.45,4982.95 2370,5017.5 2451.25,5017.5 2488.75,4980 v2(2601.25,4980) ; v2(2795,4742.5) 2795,4723.75 2850.76,4667.99 3047.95,4667.99 ; v2(2845,4742.5) 2845,4730 2887.32,4687.68 3047.95,4687.68 ; v2(2895,4742.5) 2895,4736.25 2923.89,4707.36 3047.95,4707.36 ; v2(2945,4742.5) 2960.45,4727.05 3047.95,4727.05 ; v2(2951.25,5023.75) 2972.36,5002.64 3047.95,5002.64 ; 3020,5155 3020,5111.25 3032.5,5098.75 3095,5098.75 3120,5073.75 3120,4955 3108.58,4943.58 3047.95,4943.58 ; 3047.95,4746.73 3090.77,4746.73 3120,4717.5 3120,4555 ; 3047.95,4766.42 3108.58,4766.42 3145,4730 3145,4630 3220,4555 ; 3047.95,4786.1 3048.1,4786.25 3126.25,4786.25 3170,4742.5 3170,4655 3201.25,4623.75 3251.25,4623.75 3320,4555 ; 3047.95,4805.79 3048.74,4805 v2(3163.75,4805) ; 3047.95,4825.47 3047.95,4845.16 3179.84,4845.16 3201.25,4823.75 3201.25,4673.75 3220,4655 3270,4655 3307.5,4617.5 3357.5,4617.5 3420,4555 ; 3047.95,4884.53 3162.03,4884.53 3220,4942.5 3220,5055 3320,5155 ; 3047.95,4904.21 3144.21,4904.21 3188.75,4948.75 3188.75,5123.75 3220,5155 ; 3047.95,4923.9 3126.4,4923.9 3151.25,4948.75 3151.25,5123.75 3120,5155 ; v2(3238.75,4805) 3238.75,4830 3207.5,4861.25 3207.5,4886.25 3251.25,4930 3251.25,5030 3313.75,5092.5 3357.5,5092.5 3420,5155 ; v2(3420,4698.75) 3420,4755 ; 3420,4830 v2(3420,4886.25) ; 3420,4955 v2(3420,5017.5) ; 4335,4555 4335,4842.5 4503.75,5011.25 4522.5,5011.25 4533.57,5022.32 4607.05,5022.32 ; 4335,5155 4335,5117.5 4372.5,5080 4647.5,5080 4678.75,5048.75 4785,5048.75 4816.25,5017.5 4941.25,5017.5 4975.8,4982.95 5362.95,4982.95 ; v2(4385,4667.5) 4385,4855 4516.25,4986.25 4541.25,4986.25 4557.64,5002.64 4607.05,5002.64 ; v3@4416.25,5035.76 v3(4416.74,5035.76) 4422.99,5042.01 4607.05,5042.01 ; 4435,4555 4435,4867.5 4528.75,4961.25 4560,4961.25 4562.02,4963.27 4607.05,4963.27 ; 4535,4555 4535,4592.5 4466.25,4661.25 4466.25,4861.25 4509.21,4904.21 4607.05,4904.21 ; 4607.05,4667.99 4676.29,4667.5 4853.75,4667.5 4935,4586.25 4935,4555 ; 4607.05,4687.68 4842.68,4687.68 4860,4705 v2(4860,4742.5) ; 4607.05,4707.36 4799.86,4707.36 4810,4717.5 v2(4810,4742.5) ; 4607.05,4727.05 4744.55,4727.05 v2(4760,4742.5) ; 4607.05,4746.73 4707.98,4746.73 4735,4773.75 4891.25,4773.75 4910,4755 v2(4910,4742.5) ; 4607.05,4766.42 4690.17,4766.42 4722.5,4798.75 4910,4798.75 4960,4748.75 v2(4960,4742.5) ; 4607.05,4786.1 4672.35,4786.1 4710,4823.75 4935,4823.75 5010,4748.75 v2(5010,4742.5) ; 4607.05,4805.79 4654.54,4805.79 4697.5,4848.75 4966.25,4848.75 v2(5010,4805) ; 4607.05,4825.47 4527.03,4825.47 v2(4527.03,4864.84) 4607.05,4864.84 4669.84,4864.84 4678.75,4873.75 5241.25,4873.75 5250.16,4864.84 5362.95,4864.84 ; 4607.05,4884.53 4652.03,4884.53 4666.25,4898.75 5228.75,4898.75 v2(5266.25,4936.25) ; 4607.05,4923.9 4607.19,4923.75 4716.25,4923.75 4753.75,4961.25 v2(4753.75,4973.75) ; 4607.05,4943.58 4673.58,4943.58 v2(4703.75,4973.75) ; 4607.05,4982.95 4650.45,4982.95 4685,5017.5 4766.25,5017.5 4803.75,4980 v2(4916.25,4980) ; v2(5110,4742.5) 5110,4723.75 5165.76,4667.99 5362.95,4667.99 ; v2(5160,4742.5) 5160,4730 5202.32,4687.68 5362.95,4687.68 ; v2(5210,4742.5) 5210,4736.25 5238.89,4707.36 5362.95,4707.36 ; v2(5260,4742.5) 5275.45,4727.05 5362.95,4727.05 ; v2(5266.25,5023.75) 5287.36,5002.64 5362.95,5002.64 ; 5335,5155 5335,5111.25 5347.5,5098.75 5410,5098.75 5435,5073.75 5435,4955 5423.58,4943.58 5362.95,4943.58 ; 5362.95,4746.73 5405.77,4746.73 5435,4717.5 5435,4555 ; 5362.95,4766.42 5423.58,4766.42 5460,4730 5460,4630 5535,4555 ; 5362.95,4786.1 5363.1,4786.25 5441.25,4786.25 5485,4742.5 5485,4655 5516.25,4623.75 5566.25,4623.75 5635,4555 ; 5362.95,4805.79 5363.74,4805 v2(5478.75,4805) ; 5362.95,4825.47 5362.95,4845.16 5494.84,4845.16 5516.25,4823.75 5516.25,4673.75 5535,4655 5585,4655 5622.5,4617.5 5672.5,4617.5 5735,4555 ; 5362.95,4884.53 5477.03,4884.53 5535,4942.5 5535,5055 5635,5155 ; 5362.95,4904.21 5459.21,4904.21 5503.75,4948.75 5503.75,5123.75 5535,5155 ; 5362.95,4923.9 5441.4,4923.9 5466.25,4948.75 5466.25,5123.75 5435,5155 ; v2(5553.75,4805) 5553.75,4830 5522.5,4861.25 5522.5,4886.25 5566.25,4930 5566.25,5030 5628.75,5092.5 5672.5,5092.5 5735,5155 ; v2(5735,4698.75) 5735,4755 ; 5735,4830 v2(5735,4886.25) ; 5735,4955 v2(5735,5017.5)
  Bottom Layer w12: 1920,4555 1920,4630 1957.5,4667.5 v2(2070,4667.5) ; 1920,5155 1920,5092.5 2147.66,4864.84 v2(2212.03,4864.84) ; v3(2101.74,5035.76) 2120,5055 2120,5154.51 2120.49,5154.51 2120,5155 ; 2220,5155 2220,5086.25 2313.75,5086.25 2388.75,5011.25 v2(2388.75,4973.75) ; 2320,4555 2320,4561.25 2445,4686.25 v2(2445,4742.5) ; 2320,5155 2320,5148.75 2438.75,5030 v2(2438.75,4973.75) ; 2420,4555 2420,4605 2495,4680 v2(2495,4742.5) ; 2420,5155 2488.75,5086.25 2488.75,4886.25 2595,4780 v2(2595,4742.5) ; 2520,4555 2520,4648.75 2545,4673.75 v2(2545,4742.5) ; 2520,5155 2520,4917.5 2645,4792.5 v2(2645,4742.5) ; v2(2601.25,4980) 2601.25,5036.25 2720,5155 ; 2620,5155 2551.25,5086.25 2551.25,4948.75 v2(2695,4805) ; v2(2695,4742.5) 2738.75,4786.25 2738.75,4823.75 2645,4917.5 2645,5017.5 2713.75,5086.25 2751.25,5086.25 2820,5155 ; 2720,4555 2720,4598.75 2795,4673.75 v2(2795,4742.5) ; 2820,4555 2820,4623.75 2845,4648.75 v2(2845,4742.5) ; v2(2895,4742.5) 2895,4648.75 2920,4623.75 2920,4555 ; 2920,5155 2807.5,5042.5 2732.5,5042.5 2688.75,4998.75 2688.75,4942.5 2782.5,4848.75 2782.5,4798.75 2957.5,4798.75 2988.75,4767.5 2988.75,4686.25 3045,4630 3351.25,4630 v2(3420,4698.75) ; v2(2945,4742.5) 2945,4661.25 3020,4586.25 3020,4555 ; v2(2951.25,4936.25) 3051.25,5036.25 3313.75,5036.25 3420,4930 v2(3420,4886.25) ; v2(2951.25,5023.75) 3007.5,5080 3357.5,5080 v2(3420,5017.5) ; v2(3163.75,4805) v2(3238.75,4805) ; 4235,4555 4235,4630 4272.5,4667.5 v2(4385,4667.5) ; 4235,5155 4235,5092.5 4462.66,4864.84 v2(4527.03,4864.84) ; v3(4416.74,5035.76) 4435,5055 4435,5154.51 4435.49,5154.51 4435,5155 ; 4535,5155 4535,5086.25 4628.75,5086.25 4703.75,5011.25 v2(4703.75,4973.75) ; 4635,4555 4635,4561.25 4760,4686.25 v2(4760,4742.5) ; 4635,5155 4635,5148.75 4753.75,5030 v2(4753.75,4973.75) ; 4735,4555 4735,4605 4810,4680 v2(4810,4742.5) ; 4735,5155 4803.75,5086.25 4803.75,4886.25 4910,4780 v2(4910,4742.5) ; 4835,4555 4835,4648.75 4860,4673.75 v2(4860,4742.5) ; 4835,5155 4835,4917.5 4960,4792.5 v2(4960,4742.5) ; v2(4916.25,4980) 4916.25,5036.25 5035,5155 ; 4935,5155 4866.25,5086.25 4866.25,4948.75 v2(5010,4805) ; v2(5010,4742.5) 5053.75,4786.25 5053.75,4823.75 4960,4917.5 4960,5017.5 5028.75,5086.25 5066.25,5086.25 5135,5155 ; 5035,4555 5035,4598.75 5110,4673.75 v2(5110,4742.5) ; 5135,4555 5135,4623.75 5160,4648.75 v2(5160,4742.5) ; v2(5210,4742.5) 5210,4648.75 5235,4623.75 5235,4555 ; 5235,5155 5122.5,5042.5 5047.5,5042.5 5003.75,4998.75 5003.75,4942.5 5097.5,4848.75 5097.5,4798.75 5272.5,4798.75 5303.75,4767.5 5303.75,4686.25 5360,4630 5666.25,4630 v2(5735,4698.75) ; v2(5260,4742.5) 5260,4661.25 5335,4586.25 5335,4555 ; v2(5266.25,4936.25) 5366.25,5036.25 5628.75,5036.25 5735,4930 v2(5735,4886.25) ; v2(5266.25,5023.75) 5322.5,5080 5672.5,5080 v2(5735,5017.5) ; v2(5478.75,4805) v2(5553.75,4805)

## Polygon pours and split planes (outlines as drawn)
no net on Top Layer "Polygon_1_Net_N$2" (solid, remove dead copper, pour order 22): 4179,4499 5791,4499 5791,5211 4179,5211
no net on Top Layer "Polygon_1_Net_N$2" (solid, remove dead copper, pour order 18): 1864,4499 3476,4499 3476,5211 1864,5211
GND on Top Layer "GND_L01_P000" (solid, pour order 0): 1885,4245 1890,4240 1890,2290 2310,2290 2305,2285 2305,2170 5340,2170 5340,2295 5765,2295 5770,2290 5770,4245
no net on Bottom Layer "Polygon_1_Net_N$1" (solid, remove dead copper, pour order 20): 4179,4499 4179,5211 5791,5211 5791,4499
no net on Bottom Layer "Polygon_1_Net_N$1" (solid, remove dead copper, pour order 16): 1864,4499 1864,5211 3476,5211 3476,4499
+5 on Bottom Layer "+5_L02_P002" (solid, pour order 2): 1890,4240 1890,2290 2305,2290 2305,2175 2300,2170 5340,2170 5340,2295 5770,2295 5770,4245

## Keep-outs
Top Layer:
  lines w0: 1870,4505 1870,5209.72 3469.21,5209.72 3469.21,4505 1870,4505 ; 4185,4505 4185,5209.72 5784.21,5209.72 5784.21,4505 4185,4505
  lines w10: 1865,4270 2680,4270 3705,4270 4865,4270 5795,4270
Keep-Out Layer:
  lines w10: 1865,2265 1865,4270 1865,5210 5795,5210 5795,4270 5795,2265 5370,2265 5370,1815 3830,1815 2290,1815 2290,2265 1865,2265

## Silkscreen, mask and mechanical layers (free items; w line width, h text height)
Mechanical 34:
  text "When use as CHR, solder pads 'CE' and 'CHR' together." at 1926,5236.5 h49.6
  text "When use as CHR, solder pads 'CE' and 'CHR' together." at 3731,5236.5 h49.6

## Text inside footprints (layer, text, board x,y; h text height)
BT: Top Overlay "+" at 2207.72,3845.51 h45.28 r90
J0: Top Overlay "30" at 5205,2140 h60; Top Overlay "1" at 2355,2140 h60; Bottom Overlay "60" at 5305,2140 h60; Bottom Overlay "31" at 2435,2140 h60